# Altium PCB Front Power Dist.PcbDoc
Units mm, origin at the board's own origin, x right, y up, seen from the top; angles counter-clockwise.
Board outline 97.2 x 80.1 mm, 2 copper layers (Top Layer, Bottom Layer); 33 components, 27 nets, 139 pads, 2 vias.
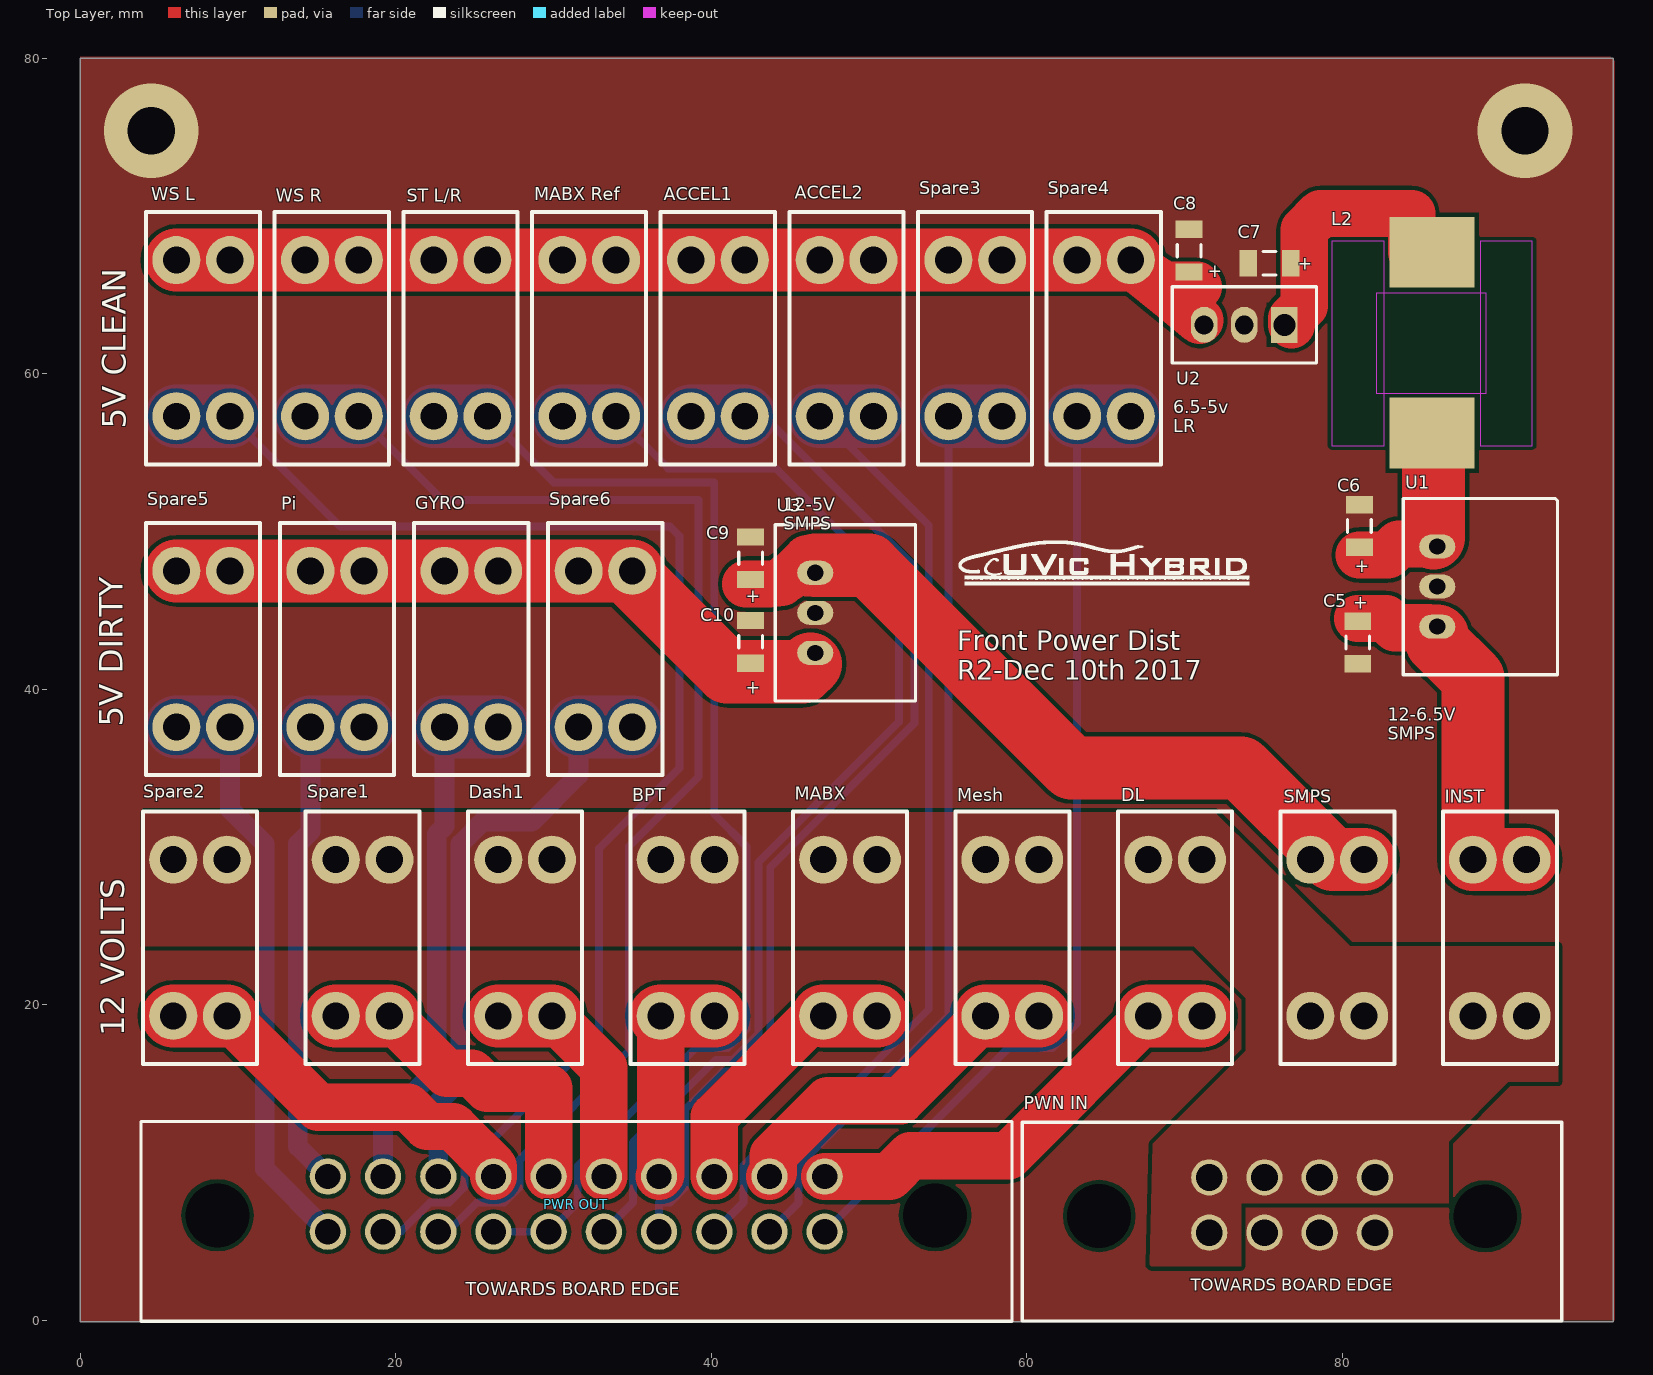
[diagram p0: Top Layer view]
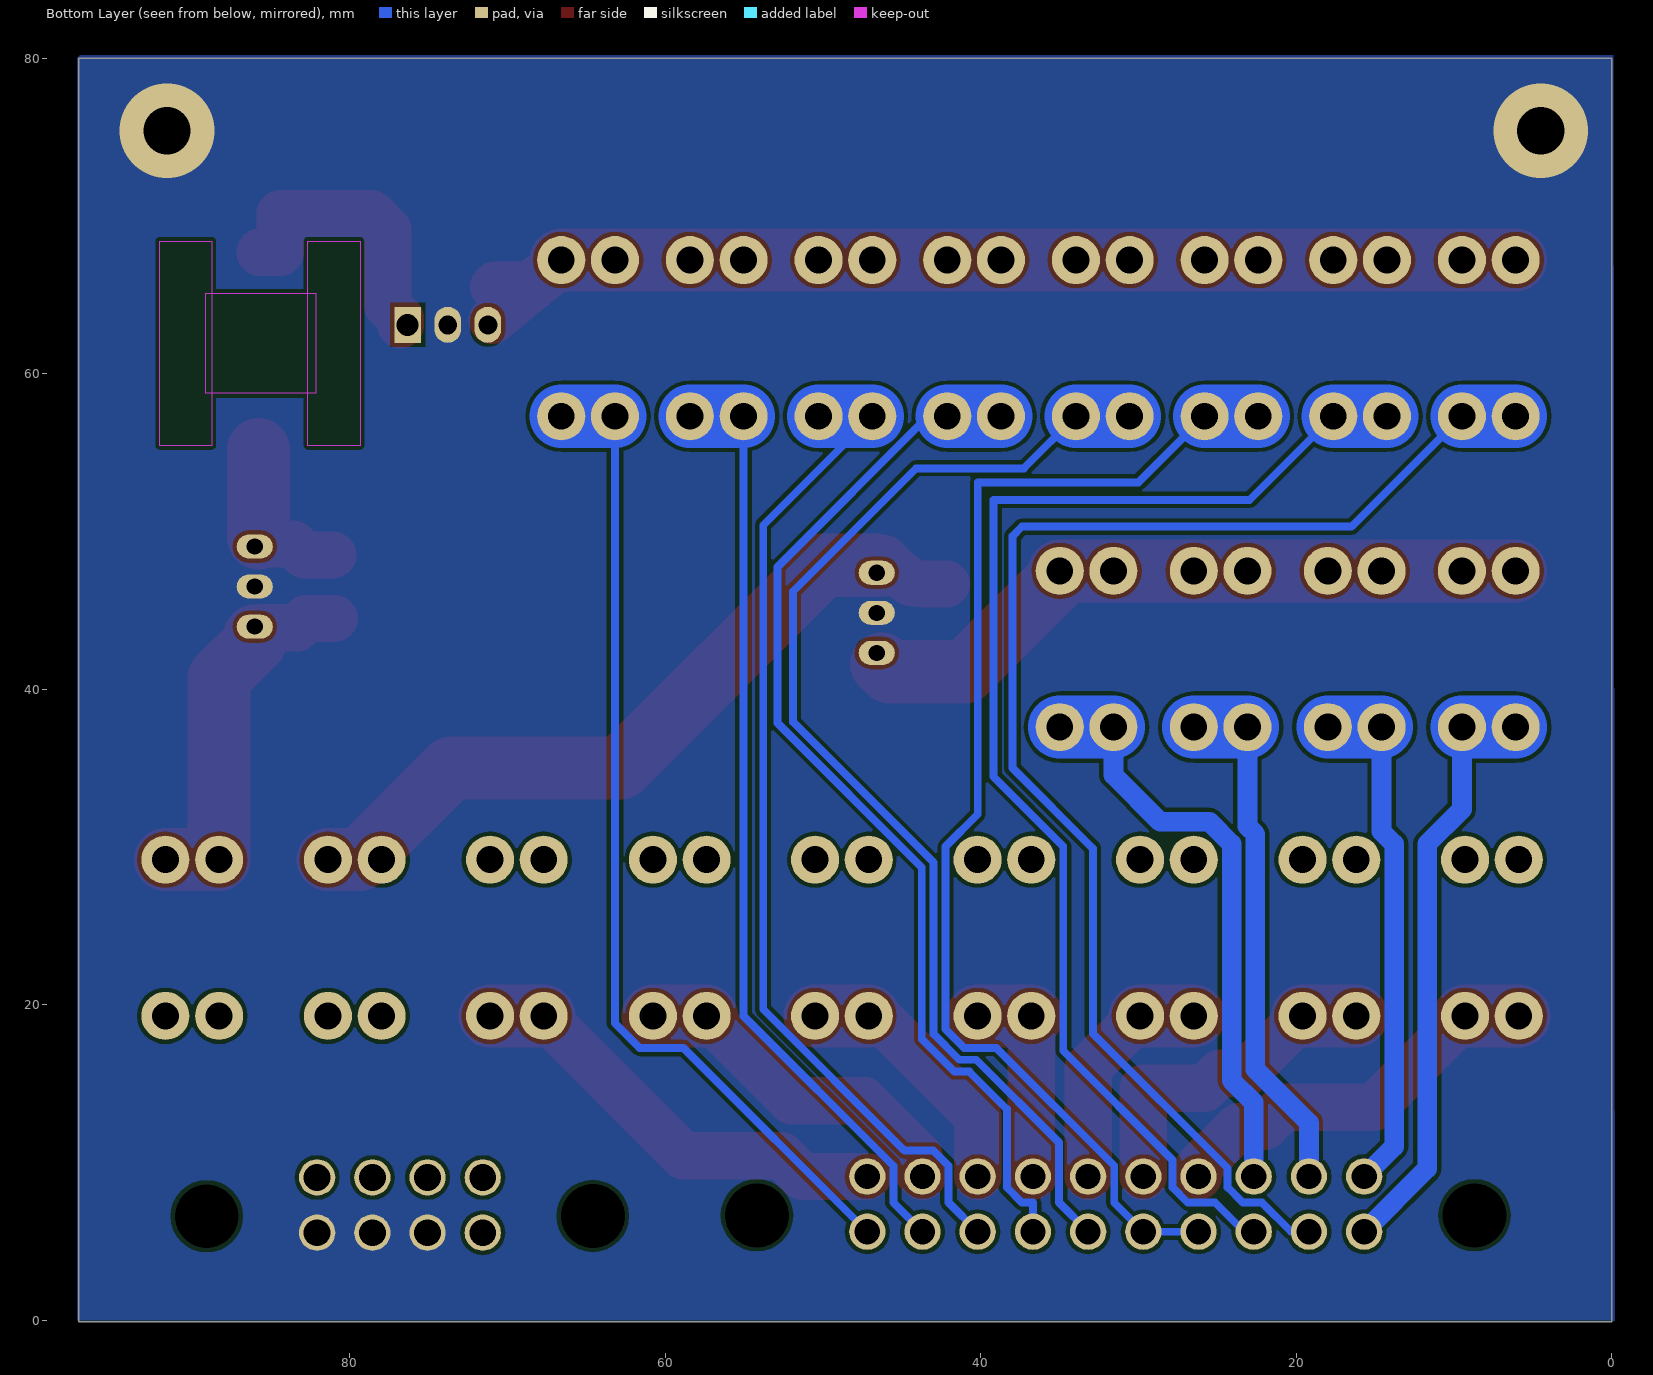
[diagram p1: Bottom Layer view, seen from below]

## Layer stack, top to bottom
Top Solder: solder mask 0.0102, Solder Resist, Dk 3.5
Top Layer: signal copper 0.0356
Dielectric 1: dielectric 0.32, FR-4, Dk 4.8
Bottom Layer: signal copper 0.0356
Bottom Solder: solder mask 0.0102, Solder Resist, Dk 3.5

## Board outline
0,-0.1 97.2,-0.1 97.2,80 0,80

## Design rules (kind name [scope] priority, off if disabled: settings)
Clearance [All] p1: gap=0.254 ignorepadtopadclearanceinfootprint=FALSE except(0: Arc-Hole Track-Hole SMDPad-Hole THPad-Hole Via-Hole Fill-Hole Poly-Hole Region-Hole Text-Hole)
NetsToIgnore [InNet('GND')] p1:
PolygonConnect [All] p1: connectstyle=Direct reliefconductorwidth=0.254 reliefentries=4 polygonreliefangle="90 Angle" airgapwidth=0.254
RoomDefinition "Front Power Dist" [InComponentClass('Outside Board Components')] p1: confinementstyle=ConfineIn formatcopy=TRUE lockcomponents=FALSE outline -70,-55 -19.2,-55 -19.2,-29.6 -70,-29.6
RoutingVias [All] p1: holewidth=0.711 width=1.27 viastyle="Through Hole" minholewidth=0.711 minwidth=1.27 maxholewidth=0.711 maxwidth=1.27
SolderMaskExpansion [All] p1: expansion=0.102
Width Width_4 [InNet('NetC9_1')] p1 off: maxlimit=3 minlimit=3 preferedwidth=3
Width Width_3 [InNet('RIGHT BRB')] p2 off: maxlimit=3 minlimit=3 preferedwidth=3
Width Width_2 [InNet('RBRB')] p3 off: maxlimit=3 minlimit=3 preferedwidth=3
Width Width_1 [All] p4: maxlimit=4 minlimit=0.5 preferedwidth=1.25
Width [InNet('GND')] p5 off: maxlimit=3 minlimit=3 preferedwidth=3
30 further rules are at their usual default settings.

## Components (designator, comment, footprint, x,y, rotation, side; value= is the part's Value field where it differs from the comment)
ACCEL1 "Fuse 2" "Fuse Holder Mini ATC/ATO" 42.131,57.3 r90 top
ACCEL2 "Fuse 2" "Fuse Holder Mini ATC/ATO" 50.288,57.3 r90 top
BPT "Fuse 2" "Fuse Holder Mini ATC/ATO" 40.209,19.283 r90 top
C5 "Cap2" C1206 81,42.95 r270 top value=10uF
C6 "Cap2" C1206 81.1,50.35 r90 top value=10uF
C7 "Cap2" C1206 75.4,67 r180 top value=22uF
C8 "Cap2" C1206 70.3,67.8 r90 top value=22uF
C9 "Cap2" C1206 42.5,48.3 r90 top value=10uF
C10 "Cap2" C1206 42.5,43 r90 top value=10uF
Dash1 "Fuse 2" "Fuse Holder Mini ATC/ATO" 29.906,19.283 r90 top
DL "Fuse 2" "Fuse Holder Mini ATC/ATO" 71.119,19.283 r90 top
GYRO "Fuse 2" "Fuse Holder Mini ATC/ATO" 26.5,37.594 r90 top
INST "Fuse 2" "Fuse Holder Mini ATC/ATO" 88.296,29.189 r270 top
L2 "Inductor" "FILTER INDUCTOR" 85.71,56.97 r180 top value=15uH
MABX "Fuse 2" "Fuse Holder Mini ATC/ATO" 50.513,19.283 r90 top
"MABX Ref" "Fuse 2" "Fuse Holder Mini ATC/ATO" 33.973,57.3 r90 top
Mesh "Fuse 2" "FUSE HOLDER MINI ATC/ATO" 57.387,29.189 r270 top
Pi "Fuse 2" "Fuse Holder Mini ATC/ATO" 18,37.594 r90 top
"PWN IN" "Header 8" "MX150 8 PIN" 76.83,7.29 r0 top
"PWR OUT" "Header 20" "MX150 20 PIN" 31.45,7.35 r0 top
SMPS "Fuse 2" "Fuse Holder Mini ATC/ATO" 77.993,29.189 r270 top
Spare1 "Fuse 2" "Fuse Holder Mini ATC/ATO" 19.603,19.283 r90 top
Spare2 "Fuse 2" "Fuse Holder Mini ATC/ATO" 9.3,19.283 r90 top
Spare3 "Fuse 2" "Fuse Holder Mini ATC/ATO" 58.446,57.3 r90 top
Spare4 "Fuse 2" "Fuse Holder Mini ATC/ATO" 66.604,57.3 r90 top
Spare5 "Fuse 2" "Fuse Holder Mini ATC/ATO" 9.5,37.594 r90 top
Spare6 "Fuse 2" "Fuse Holder Mini ATC/ATO" 35,37.594 r90 top
"ST L/R" "Fuse 2" "Fuse Holder Mini ATC/ATO" 25.815,57.3 r90 top
U1 "6.5V SMPS" V7806-1000 86.036,46.5 r90 top
U2 "5V LIN REG" TO-220-3 73.8,63.1 r180 top
U3 "12-5V SMPS" Rr-788E5 46.6,44.84 r270 top
"WS L" "Fuse 2" "Fuse Holder Mini ATC/ATO" 9.5,57.3 r90 top
"WS R" "Fuse 2" "Fuse Holder Mini ATC/ATO" 17.658,57.3 r90 top

## Footprints (in the part's own frame and the unit in brackets; to place one, negate y for a bottom-side part, rotate by r counter-clockwise, add the part's x,y. Pads: shape width x height; smd on the part's side, far side on the other; paste and mask are expansions set on the pad)
C1206 [mm] "Chip Capacitor, Body 3.2x1.6mm, IPC High Density"
  rect 1.1x1.7 smd: 1(-1.35,0) 2(1.35,0)
  silkscreen extent -0.4,-0.75 0.4,0.75, body extent -1.7,-0.9 1.7,0.9, height 1.3
"FILTER INDUCTOR" [mm]
  rect 5.4x4.5 smd: 1(0,0.74) 2(0.01,-10.73)
  Keep-Out Layer region: -6.35,-11.43 -3.048,-11.43 -3.048,1.524 -6.35,1.524
  Keep-Out Layer region: 3.048,-11.43 6.35,-11.43 6.35,1.524 3.048,1.524
  Keep-Out Layer region: -3.429,-8.128 3.556,-8.128 3.556,-1.778 -3.429,-1.778
"Fuse Holder Mini ATC/ATO" [mil] "BK-6010"
  round 120 hole 67: 1(0,134) 1(0,0) 2(390,0) 2(390,134)
  silkscreen extent -120,-75 510,210, body extent -120,-75 510,210, height 290
"FUSE HOLDER MINI ATC/ATO" [mil] "BK-6010"
  round 120 hole 67: 1(0,134) 1(0,0) 2(390,0) 2(390,134)
  silkscreen extent -120,-75 510,210, body extent -120,-75 510,210, height 290
"MX150 8 PIN" [mm]
  round 2.3 hole 1.7: 1(-5.25,1.75) 2(-1.75,1.75) 3(1.75,1.75) 4(5.25,1.75) 5(-5.25,-1.75) 6(-1.75,-1.75) 7(1.75,-1.75) 8(5.25,-1.75)
  round 1.9 hole 4.05 unplated: 21(-12.23,-0.69) 21(12.25,-0.71)
  silkscreen extent -17.1,-7.35 17.1,5.25, body extent -17.06,-7.32 17.06,5.25, height 25.29
"MX150 20 PIN" [mm]
  round 2.3 hole 1.6: 1(-15.75,1.75) 2(-12.25,1.75) 3(-8.75,1.75) 4(-5.25,1.75) 5(-1.75,1.75) 6(1.75,1.75) 7(5.25,1.75) 8(8.75,1.75) 9(12.25,1.75) 10(15.75,1.75) 11(-15.75,-1.75) 12(-12.25,-1.75) 13(-8.75,-1.75) 14(-5.25,-1.75) 15(-1.75,-1.75) 16(1.75,-1.75) 17(5.25,-1.75) 18(8.75,-1.75) 19(12.25,-1.75) 20(15.75,-1.75)
  round 1.9 hole 4.05 unplated: 21(22.75,-0.71) 22(-22.75,-0.71)
  silkscreen extent -27.59,-7.43 27.63,5.24, body extent -27.58,-7.42 27.59,5.22, height 25.29
Rr-788E5 [mil] "5V OUTPUT SMPS"
  oval 60x90 hole 40: 1(-100,0) 2(0,0) 3(100,0)
  silkscreen extent -220,-100 220,250, body extent -220,-100 220,250, height 409
TO-220-3 [mm] "LM2940CT 5V LINEAR REG"
  rect 1.7x2.286 hole 1.4: 1(-2.54,0)
  oval 1.7x2.286 hole 1.2: 2(0,0) 3(2.54,0)
  silkscreen extent -4.57,-2.41 4.57,2.41
V7806-1000 [mil] "6.5V output SMPS"
  oval 60x90 hole 40: 1(-100,0) 2(0,0) 3(100,0)
  silkscreen extent -220,-300 220,85

## Part data
ACCEL1 ACCEL2 BPT Dash1 DL GYRO INST MABX "MABX Ref" Mesh Pi SMPS Spare1 Spare2 Spare3 Spare4 Spare5 Spare6 "ST L/R" "WS L" "WS R": "Fuse", LatestRevisionDate=17-Jul-2002, LatestRevisionNote="Re-released for DXP Platform.", PackageDescription="Thru-Hole; 2 Leads", PackageReference=PIN-W2/E2.8, Published=8-Jun-2000, Publisher="Altium Limited", Supplier 1=Digi-Key, Supplier 2=Digi-Key, Supplier Part Number 2=36-3568-ND
C5 C9 C10: "Capacitor", Supplier Part Number 1=1276-3298-1-ND, PackageDescription="Capacitor; 2 Leads", PackageReference=CAPR5-4X5, Published=23-Sep-2002, Publisher="Altium Limited", Supplier 1=Digi-Key
C6: "Capacitor", Supplier Part Number 1=490-5961-1-ND, PackageDescription="Capacitor; 2 Leads", PackageReference=CAPR5-4X5, Published=23-Sep-2002, Publisher="Altium Limited", Supplier 1=Digi-Key
C7 C8: "Capacitor", Supplier Part Number 1=1276-3299-1-ND, PackageDescription="Capacitor; 2 Leads", PackageReference=CAPR5-4X5, Published=23-Sep-2002, Publisher="Altium Limited", Supplier 1=Digi-Key
L2: Supplier Part Number 1=732-1242-1-ND, Code_IEC=1005, Code_JEITA=0402, LatestRevisionDate=29-May-2009, LatestRevisionNote="IPC-7351 Footprint Added.", PackageDescription="Chip Inductor", PackageReference=0402-A, Published=8-Jun-2000, Publisher="Altium Limited", Supplier 1=Digi-Key
"PWN IN": library part "8 Pin Connector", Supplier Part Number=12345
"PWR OUT": "Header, 20-Pin", Supplier Part Number 1=538-34830-2002, LatestRevisionDate=17-Jul-2002, LatestRevisionNote="Re-released for DXP Platform.", Publisher="Altium Limited", Supplier 1=Mouser
U1: library part Component_1, Supplier Part Number 1=102-1716-ND, Supplier 1=Digi-Key
U2: library part Component_1, Supplier Part Number 1=LM2940CT-5.0/NOPB-ND, Supplier 1=Digi-Key
U3: library part Component_1, Supplier Part Number 1=945-2201-ND, Supplier 1=Digi-Key

## Via types
v1: diameter 6, hole 3, Top Layer to Bottom Layer, 2 vias

## Nets (pads, with @x,y where several pads share a name; then routed paths per layer and width w, separated by ;. In a path a pad name is that pad's centre, name@x,y a point inside that pad or via, vN(x,y) a via of type N, cw(c..) or ccw(c..) an arc to the next point about the centre after c; other vN are vias at no path point)
GND: "PWN IN.6" "PWN IN.7" "PWN IN.8" C5.2 C6.2 C7.2 C8.2 C9.2 C10.2 U1.2 U2.2 U3.2
  other v1: 4.5,75.4 91.6,75.4
NetACCEL1_1: "PWR OUT.17" ACCEL1.1 | length 68
  Bottom Layer w0.5: 36.7,5.6 36.7,7.446 37.385,7.446 38.354,8.415 38.354,13.371 40.73,15.747 41.674,15.747 43.746,17.818 43.746,28.693 52.9,37.848 52.9,47.744 43.3,57.344 43.3,57.3 ACCEL1.1@42.131,57.3
  Bottom Layer w4: ACCEL1.1@38.727,57.3 ACCEL1.1@42.131,57.3
NetACCEL1_2: "MABX Ref.2" "ST L/R.2" "WS L.2" "WS R.2" ACCEL1.2 ACCEL2.2 C8.1 Spare3.2 Spare4.2 U2.3 | length 71.7
  Top Layer w3: 70.9,65.5 70.8,65.6 68.76,65.6 66.511,67.063 66.3,67.2 66.479,67.054 68.948,65.039 69.052,64.954 69.068,64.941 69.187,64.844 69.406,64.665 69.466,64.616 69.477,64.607 69.488,64.598 U2.3@70.98,63.38
  Top Layer w4: 6.096,67.206 9.5,67.206 14.254,67.206 17.658,67.206 22.412,67.206 25.815,67.206 30.569,67.206 33.973,67.206 38.727,67.206 42.131,67.206 46.885,67.206 50.288,67.206 55.042,67.206 58.446,67.206 63.2,67.206 Spare4.2@66.604,67.206
NetACCEL2_1: "PWR OUT.18" ACCEL2.1 | length 64.7
  Bottom Layer w0.5: 40.2,5.6 42.046,7.446 42.046,9.785 43.015,10.754 44.852,10.754 53.8,19.702 53.8,50.385 ACCEL2.1@46.885,57.3
  Bottom Layer w4: ACCEL2.1@46.885,57.3 ACCEL2.1@50.288,57.3
NetBPT_1: "PWR OUT.7" BPT.1 | length 13.6
  Top Layer w3: 36.7,9.1 36.806,9.206 BPT.1@36.806,19.283
  Top Layer w4: BPT.1@36.806,19.283 BPT.1@40.21,19.283
NetC5_1: C5.1 INST.1 U1.1 | length 24
  Top Layer w3: C5.1@81,44.479 82.781,44.479 83.36,43.9 85.5,43.9 U1.1@86.036,43.364
  Top Layer w4: U1.1@86.036,43.364 86.036,42.964 88.296,40.704 88.296,29.189 INST.1@91.7,29.189
NetC6_1: C6.1 L2.1 U1.3 | length 10.7
  Top Layer w3: C6.1@81.1,48.5 82.9,48.5 83.6,49.2 U1.3@85.876,49.2
  Top Layer w4: U1.3@85.8,49.6 L2.1@85.8,55.2
NetC7_1: C7.1 L2.2 U2.1 | length 17.3
  Top Layer w3: U2.1@76.8,63.1 76.8,63.496 77.606,64.302 77.606,69.127 78.633,70.154 84.416,70.154 84.416,67.7 L2.2
NetC9_1: C9.1 SMPS.1 U3.1 | length 48.5
  Top Layer w3: C9.1@42.2,46.671 43.678,46.671 44.471,46.771 44.8,47.1 44.921,47.1 46.1,48.279 46.1,47.38 U3.1
  Top Layer w4: U3.1@46.6,47.856 49.997,47.856 62.853,35 73.6,35 79.411,29.189 SMPS.1@81.397,29.189
NetC10_1: C10.1 GYRO.2 Pi.2 Spare5.2 Spare6.2 U3.3 | length 43.3
  Top Layer w4: Spare5.2@6.096,47.5 9.5,47.5 14.596,47.5 18,47.5 23.096,47.5 26.5,47.5 31.596,47.5 35,47.5 35,47.112 41.012,41.1 45.8,41.1 U3.3@46.3,41.6
NetDash1_1: "PWR OUT.6" Dash1.1 | length 15
  Top Layer w3: Dash1.1@29.906,19.283 33.2,15.989 33.2,9.1
  Top Layer w4: Dash1.1@26.503,19.283 Dash1.1@29.906,19.283
NetDL_1: "PWR OUT.10" DL.1 | length 28.1
  Top Layer w3: 47.2,9.1 51.316,9.1 52.635,10.419 58.851,10.419 DL.1@67.715,19.283
  Top Layer w4: DL.1@67.715,19.283 DL.1@71.119,19.283
NetGYRO_1: "PWR OUT.2" GYRO.1 | length 33.5
  Bottom Layer w1.25: 19.2,9.1 19.2,12.5 22.596,15.896 22.596,30.807 23.096,31.308 GYRO.1@23.096,37.594
  Bottom Layer w4: GYRO.1@23.096,37.594 GYRO.1@26.5,37.594
"NetMABX Ref_1": "MABX Ref.1" "PWR OUT.16" | length 74.9
  Bottom Layer w0.5: 33.2,5.6 35.046,7.446 35.046,11.251 40.296,16.501 41.362,16.501 42.992,18.131 42.992,29.006 51.9,37.914 51.9,46.2 44.1,54 37.273,54 33.973,57.3
  Bottom Layer w4: 30.569,57.3 33.973,57.3
NetMABX_1: "PWR OUT.8" MABX.1 | length 16.8
  Top Layer w3: 40.2,9.1 40.2,12.9 46.583,19.283 MABX.1@47.109,19.283
  Top Layer w4: MABX.1@47.109,19.283 MABX.1@50.513,19.283
NetMesh_2: "PWR OUT.9" Mesh.2 | length 22
  Top Layer w3: 43.7,9.1 43.946,9.346 43.946,10.448 47.394,13.896 52,13.896 Mesh.2@57.387,19.283
  Top Layer w4: Mesh.2@57.387,19.283 Mesh.2@60.79,19.283
NetPi_1: "PWR OUT.1" Pi.1 | length 33
  Bottom Layer w1.25: Pi.1@14.596,37.594 14.596,30.984 13.797,30.184 13.797,11.003 15.7,9.1
  Bottom Layer w4: Pi.1@14.596,37.594 Pi.1@18,37.594
"NetPWR OUT_3": "PWR OUT.3" Spare6.1 | length 37.4
  Bottom Layer w1.25: 22.7,9.1 22.7,13.8 24.1,15.2 24.1,30.184 25.507,31.592 28.633,31.592 31.596,34.555 Spare6.1@31.596,37.594
  Bottom Layer w4: Spare6.1@31.596,37.594 Spare6.1@35,37.594
"NetPWR OUT_4": "PWR OUT.4" Spare2.1 | length 24.9
  Top Layer w3: Spare2.1@9.3,19.283 15.083,13.5 20.784,13.5 22.009,12.275 23.632,12.275 23.903,12.004 ; 23.871,12.004 23.903,12.004 ; 26.2,9.1 26.2,9.707 23.903,12.004
  Top Layer w4: Spare2.1@5.896,19.283 Spare2.1@9.3,19.283
"NetPWR OUT_5": "PWR OUT.5" Spare1.1 | length 21
  Top Layer w3: Spare1.1@19.603,19.283 23.233,15.653 24.824,15.653 24.948,15.529 24.98,15.529 25.809,14.7 29.7,14.7 29.7,9.1
  Top Layer w4: Spare1.1@16.2,19.283 Spare1.1@19.603,19.283
"NetPWR OUT_11": "PWR OUT.11" Spare5.1 | length 38
  Bottom Layer w1.25: Spare5.1@9.5,37.594 9.5,32.387 11.703,30.184 11.703,9.597 15.7,5.6
  Bottom Layer w4: Spare5.1@6.096,37.594 Spare5.1@9.5,37.594
"NetPWR OUT_12": "PWR OUT.12" "WS L.1" | length 88.3
  Bottom Layer w0.5: 9.5,57.3 16.5,50.3 37.4,50.3 38,49.7 38,35 32.9,29.9 32.9,18.171 24.354,9.625 24.354,8.415 23.385,7.446 22.175,7.446 20.329,5.6 19.2,5.6
  Bottom Layer w4: 6.096,57.3 9.5,57.3
"NetPWR OUT_13": "PWR OUT.13" "WS R.1" | length 81.7
  Bottom Layer w0.5: 17.658,57.3 22.958,52 39.2,52 39.2,34.451 34.778,30.029 34.778,17.078 27.854,10.154 27.854,8.415 26.885,7.446 25.146,7.446 23.3,5.6 22.7,5.6
  Bottom Layer w4: 14.254,57.3 17.658,57.3
"NetPWR OUT_14": "PWR OUT.14" "PWR OUT.15" "ST L/R.1" | length 77.8
  Bottom Layer w0.5: 25.815,57.3 30.015,53.1 40.2,53.1 40.2,32.067 42.238,30.029 42.238,18.443 41.05,17.255 39.016,17.255 31.546,9.785 31.546,7.446 29.7,5.6 26.2,5.6
  Bottom Layer w4: 22.412,57.3 25.815,57.3
"NetPWR OUT_19": "PWR OUT.19" Spare3.1 | length 59.8
  Bottom Layer w0.5: 43.7,5.6 45.546,7.446 45.546,9.785 55.042,19.281 Spare3.1@55.042,57.3
  Bottom Layer w4: Spare3.1@55.042,57.3 Spare3.1@58.446,57.3
"NetPWR OUT_20": "PWR OUT.20" Spare4.1 | length 63.4
  Bottom Layer w0.5: 47.2,5.6 58.855,17.255 61.63,17.255 63.2,18.825 Spare4.1@63.2,57.3
  Bottom Layer w4: Spare4.1@63.2,57.3 Spare4.1@66.604,57.3
"RIGHT BRB": "PWN IN.1" "PWN IN.2" "PWN IN.3" "PWN IN.4" "PWN IN.5" BPT.2 Dash1.2 DL.2 INST.2 MABX.2 Mesh.1 SMPS.2 Spare1.2 Spare2.2
pads on no net: "PWN IN.21" "PWR OUT.21" "PWR OUT.22"

## Polygon pours and split planes (outlines as drawn)
GND on Top Layer "GND" (solid, pour order 31): 0,-0.1 0,80.1 97,80.1 97.3,79.8 97.3,0
"RIGHT BRB" on Top Layer "RIGHT BRB" (solid, pour order 23): 73.6,3.4 67.808,3.4 68.013,11.177 73.9,17.064 73.9,20.4 70.6,23.7 4.1,23.7 4.1,32.2 71.924,32.2 80.536,23.7 93.7,23.7 93.7,15.1 90.55,15.1 86.75,11.3 86.75,7.4 73.6,7.4
GND on Bottom Layer "GND" (solid, pour order 33): -0.1,80.2 97.1,80.2 97.3,80 97.3,0 0,0 -0.2,-0.2

## Silkscreen, mask and mechanical layers (free items; w line width, h text height)
Top Overlay:
  drawing of 35771 lines, arcs and shapes, not listed
  text "+" at 77.2,66.6 h0.8
  text "+" at 71.5,66.1 h0.8
  text "5V CLEAN" at 2.9,56.5 h1.5 r90
  text "6.5-5v  / LR" at 69.3,56.3 h0.8
  text "+" at 80.8,47.4 h0.8
  text "+" at 42.2,45.5 h0.8
  text "+" at 80.7,45.1 h0.8
  text "Front Power Dist / R2-Dec 10th 2017" at 55.6,40.6 h1.25
  text "+" at 42.2,39.7 h0.8
  text "5V DIRTY" at 2.7,37.6 h1.5 r90
  text "12 VOLTS" at 2.8,18 h1.5 r90
Mechanical 1:
  the board outline again, w1.2

## Text inside footprints (layer, text, board x,y; h text height)
"PWN IN": Top Overlay "TOWARDS BOARD EDGE" at 70.41,1.85 h0.76
"PWR OUT": Top Overlay "TOWARDS BOARD EDGE" at 24.45,1.57 h0.8
U1: Top Overlay "12-6.5V / SMPS" at 82.9,36.8 h0.8
U3: Top Overlay "12-5V / SMPS" at 44.6,50.1 h0.8